# Altium PCB 主板-双BH(1).PcbDoc (part 10 of 13)
Units mm, origin at the board's own origin, x right, y up, seen from the top; angles counter-clockwise.
Board outline 97.69 x 103.45 mm, 2 copper layers (Top Layer, Bottom Layer); 78 components, 75 nets, 243 pads, 279 vias.
Unrouted connection lines stored in the file: 7.
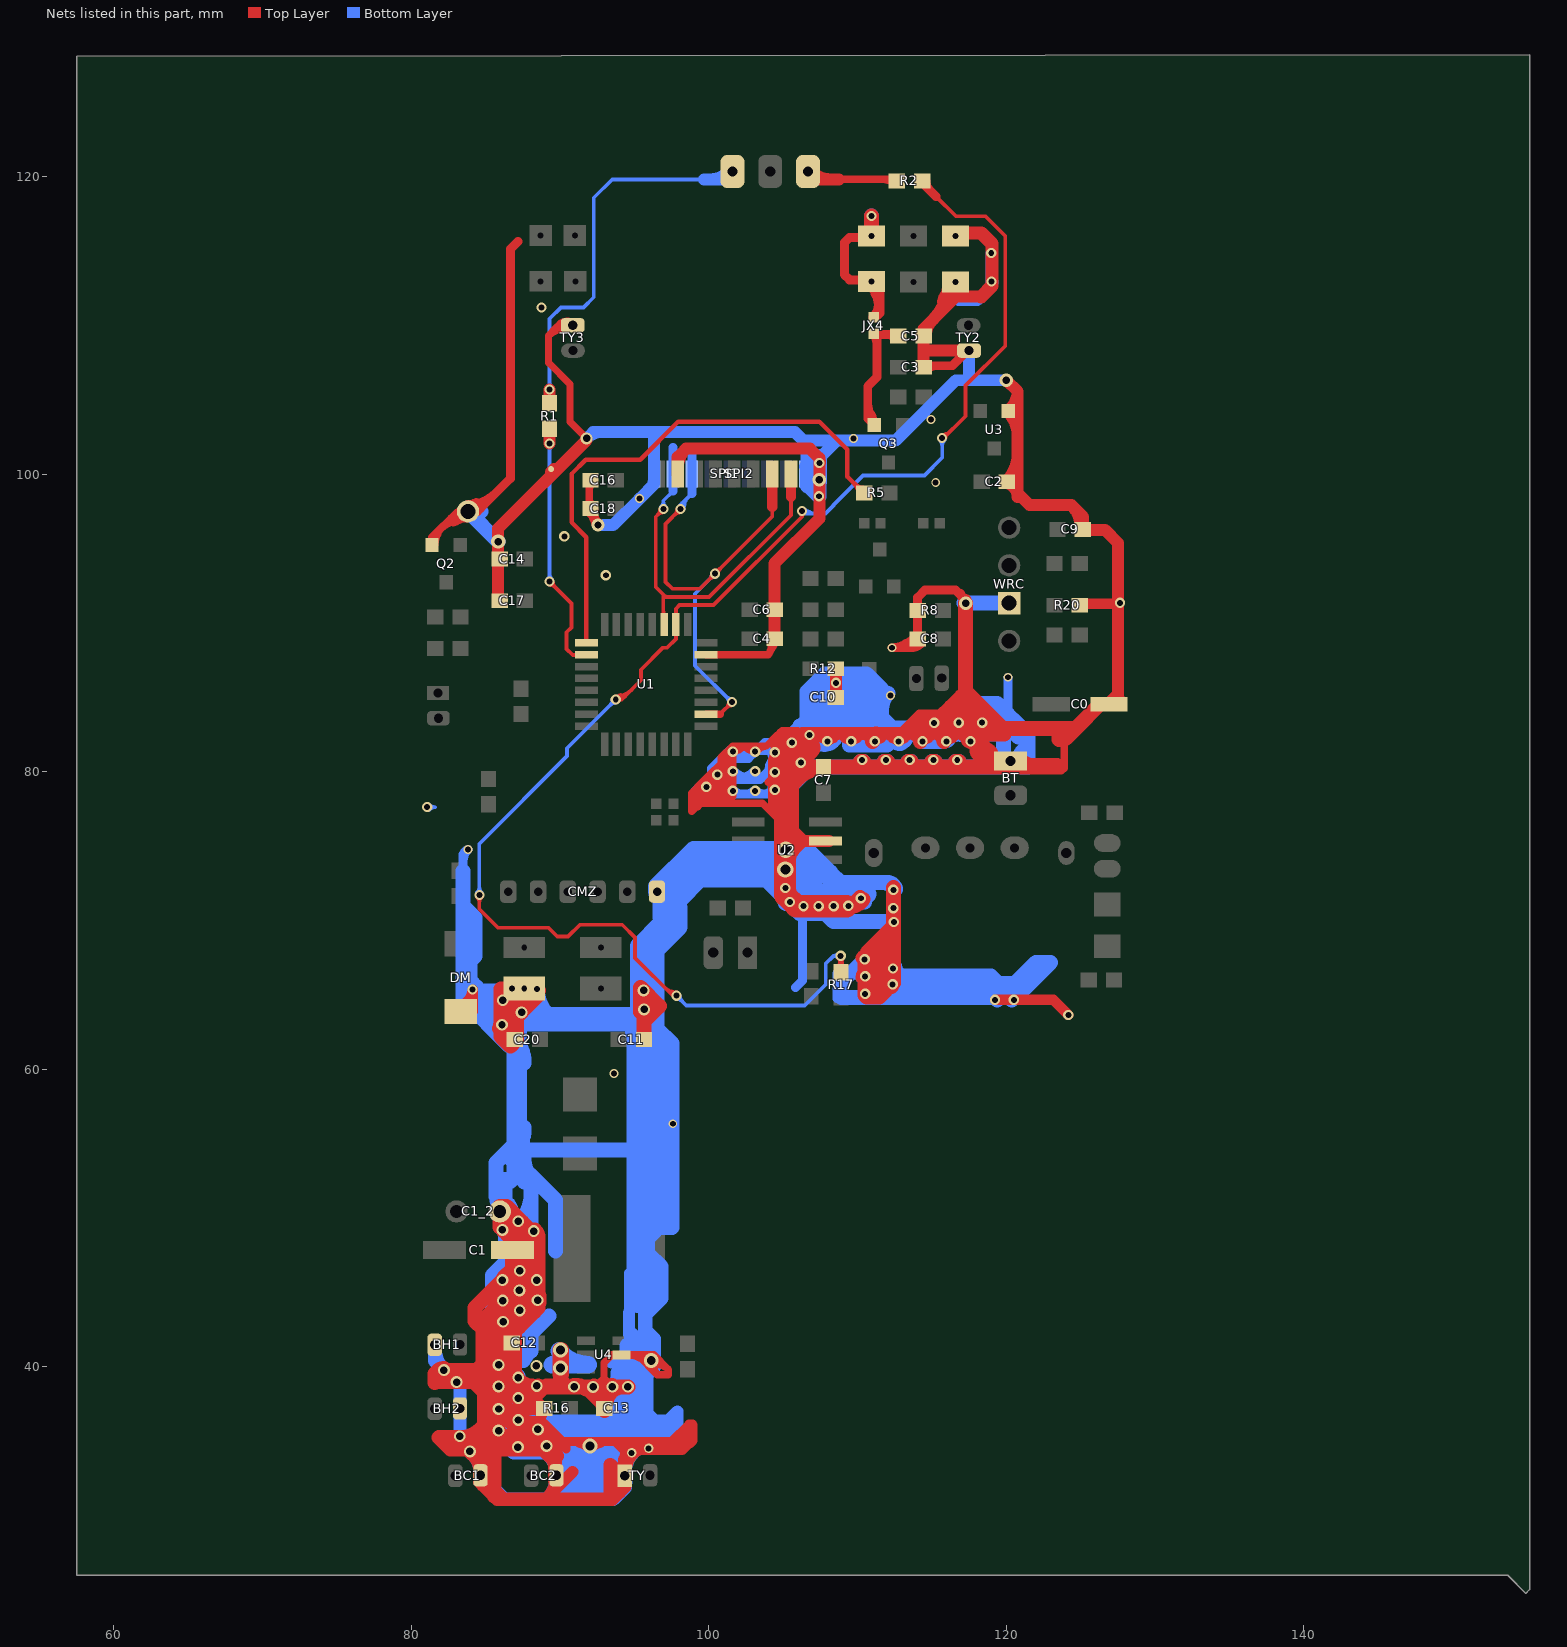
[diagram p10: the nets of this part, all layers, seen from the top]

## Via types
v1: diameter 0.7, hole 0.4, Top Layer to Bottom Layer, 108 vias
v2: diameter 0.68, hole 0.4, Top Layer to Bottom Layer, 87 vias
v3: diameter 0.8, hole 0.5, Top Layer to Bottom Layer, tented both sides, 33 vias
v4: diameter 0.6, hole 0.4, Top Layer to Bottom Layer, 12 vias
v5: diameter 0.9, hole 0.5, Top Layer to Bottom Layer, 8 vias
v6: diameter 0.8, hole 0.5, Top Layer to Bottom Layer, 6 vias
v7: diameter 1, hole 0.75, Top Layer to Bottom Layer, tented both sides, 5 vias
v8: diameter 3.4, hole 2.9, Top Layer to Bottom Layer, 4 vias
v9: diameter 1, hole 0.6, Top Layer to Bottom Layer, tented both sides, 3 vias
v10: diameter 1, hole 0.56, Top Layer to Bottom Layer, tented both sides, 2 vias
v11: diameter 1.1, hole 0.68, Top Layer to Bottom Layer, 2 vias
v12: diameter 0.8, hole 0.4, Top Layer to Bottom Layer, 2 vias
v13: diameter 0.65, hole 0.4, Top Layer to Bottom Layer, tented both sides, 2 vias
v14: diameter 1, hole 0.6, Top Layer to Bottom Layer, tented bottom, 1 vias
v15: diameter 0.7, hole 0.4, Top Layer to Bottom Layer, tented bottom, 1 vias
v16: diameter 0.95, hole 0.5, Top Layer to Bottom Layer, 1 vias
v17: diameter 0.64, hole 0.4, Top Layer to Bottom Layer, 1 vias
v18: diameter 0.62, hole 0.4, Top Layer to Bottom Layer, 1 vias

## Nets (pads, with @x,y where several pads share a name; then routed paths per layer and width w, separated by ;. In a path a pad name is that pad's centre, name@x,y a point inside that pad or via, vN(x,y) a via of type N, cw(c..) or ccw(c..) an arc to the next point about the centre after c; other vN are vias at no path point) (continued)
GND: (continued)
  Bottom Layer w1: 109.985,71.247 ccw(c109.985,71.752) v1@110.342,71.395 ; 109.985,71.247 ccw(c109.985,71.752) v1@110.342,71.395 ; 110.203,66.523 cw(c110.203,65.931) v1@110.621,66.349 ; 110.203,66.523 cw(c110.203,65.931) v1@110.621,66.349 ; 110.203,66.523 cw(c110.203,65.931) v1@110.621,66.349 ; v1@110.206,80.691 ccw(c111.115,81.6) 111.115,80.315 ; v1@110.206,80.691 ccw(c111.115,81.6) 111.115,80.315 ; v1@110.206,80.691 ccw(c111.115,81.6) 111.115,80.315 ; 110.264,64.821 ccw(c110.264,65.326) v1@110.621,64.969 ; 110.264,64.821 ccw(c110.264,65.326) v1@110.621,64.969 ; 110.264,64.821 ccw(c110.264,65.326) v1@110.621,64.969 ; 110.372,82.525 cw(c110.372,81.239) v1@111.281,82.148 ; 110.372,82.525 cw(c110.372,81.239) v1@111.281,82.148 ; 110.372,82.525 cw(c110.372,81.239) v1@111.281,82.148 ; v1@110.398,66.149 cw(c111.107,66.718) v1@110.465,67.361 ; v1@110.398,66.149 cw(c111.107,66.718) v1@110.465,67.361 ; v1@110.398,66.149 cw(c111.107,66.718) v1@110.465,67.361 ; v1@110.409,64.969 ccw(c110.766,65.326) 110.766,64.821 ; v1@110.409,64.969 ccw(c110.766,65.326) 110.766,64.821 ; v1@110.409,64.969 ccw(c110.766,65.326) 110.766,64.821 ; v1@110.409,64.969 v1@110.557,64.821 ; v1@110.409,66.349 cw(c110.828,65.931) 110.828,66.523 ; v1@110.409,66.349 cw(c110.828,65.931) 110.828,66.523 ; v1@110.409,66.349 cw(c110.828,65.931) 110.828,66.523 ; v1@110.44,66.373 cw(c110.832,65.694) 111.035,66.451 ; v1@110.44,66.373 cw(c110.832,65.694) 111.035,66.451 ; v1@110.44,66.373 cw(c110.832,65.694) 111.035,66.451 ; v1@110.44,66.373 cw(c110.832,65.694) 111.035,66.451 ; v1@110.44,66.373 cw(c110.832,65.694) 111.035,66.451 ; v1@110.44,66.373 cw(c110.832,65.694) 111.035,66.451 ; v1@110.465,67.361 109.626,66.523 108.941,65.837 108.941,64.821 v1@110.557,64.821 ; v1@110.465,67.361 111.811,67.361 ; v1@110.557,64.821 113.005,64.821 ; 110.583,82.488 ccw(c111.18,82.488) v1@111.174,81.892 ; 110.583,82.488 ccw(c111.18,82.488) v1@111.174,81.892 ; 110.583,82.488 ccw(c111.18,82.488) v1@111.174,81.892 ; 110.583,82.488 110.583,82.525 ; 110.583,82.488 110.62,82.525 ; 110.583,82.525 cw(c110.583,81.682) v1@111.303,82.12 ; 110.583,82.525 ccw(c111.218,82.525) v1@111.162,81.893 ; 110.583,82.525 ccw(c111.218,82.525) v1@111.162,81.893 ; 110.583,82.525 cw(c110.583,81.682) v1@111.303,82.12 ; 110.583,82.525 cw(c110.583,81.682) v1@111.303,82.12 ; 110.583,82.525 ccw(c111.218,82.525) v1@111.162,81.893 ; 110.583,82.525 ccw(c111.218,82.525) v1@111.162,81.893 ; 110.583,82.525 cw(c110.583,81.682) v1@111.303,82.12 ; 110.583,82.525 cw(c110.583,81.682) v1@111.303,82.12 ; 110.583,82.525 ccw(c111.218,82.525) v1@111.162,81.893 ; 110.583,82.525 ccw(c111.218,82.525) v1@111.162,81.893 ; 110.583,82.525 cw(c110.583,81.682) v1@111.303,82.12 ; 110.583,82.525 110.62,82.525 ; 110.583,82.525 110.583,82.561 ; 110.583,82.561 ccw(c111.259,82.561) v1@111.151,81.894 ; 110.583,82.561 ccw(c111.259,82.561) v1@111.151,81.894 ; 110.583,82.561 ccw(c111.259,82.561) v1@111.151,81.894 ; 110.583,82.561 110.62,82.525 ; 110.62,82.525 cw(c110.62,81.744) v1@111.307,82.113 ; 110.62,82.525 cw(c110.62,81.744) v1@111.307,82.113 ; 110.62,82.525 cw(c110.62,81.744) v1@111.307,82.113 ; 110.62,82.525 cw(c110.62,81.744) v1@111.307,82.113 ; 110.62,82.525 cw(c110.62,81.744) v1@111.307,82.113 ; 110.62,82.525 cw(c110.62,81.744) v1@111.307,82.113 ; 110.62,82.525 112.092,82.525 ; 110.769,66.523 cw(c110.769,64.11) v1@112.476,65.816 ; 110.769,66.523 cw(c110.769,64.11) v1@112.476,65.816 ; 110.769,66.523 cw(c110.769,64.11) v1@112.476,65.816 ; 110.924,81.788 ccw(c110.924,82.293) v1@111.281,81.936 ; 110.924,81.788 ccw(c110.924,82.293) v1@111.281,81.936 ; 110.924,81.788 ccw(c110.924,82.293) v1@111.281,81.936 ; v1@111.069,81.936 ccw(c111.426,82.293) 111.426,81.788 ; v1@111.069,81.936 ccw(c111.426,82.293) 111.426,81.788 ; v1@111.069,81.936 ccw(c111.426,82.293) 111.426,81.788 ; v1@111.069,82.148 cw(c111.978,81.239) 111.978,82.525 ; v1@111.069,82.148 cw(c111.978,81.239) 111.978,82.525 ; v1@111.069,82.148 cw(c111.978,81.239) 111.978,82.525 ; 111.109,80.315 ccw(c111.109,81.6) v1@112.018,80.691 ; 111.109,80.315 ccw(c111.109,81.6) v1@112.018,80.691 ; 111.109,80.315 ccw(c111.109,81.6) v1@112.018,80.691 ; 111.347,67.361 cw(c111.347,65.728) v1@112.501,66.883 ; 111.347,67.361 cw(c111.347,65.728) v1@112.501,66.883 ; 111.347,67.361 cw(c111.347,65.728) v1@112.501,66.883 ; 111.556,72.568 cw(c111.556,71.196) v1@112.526,72.166 ; 111.556,72.568 cw(c111.556,71.196) v1@112.526,72.166 ; 111.556,72.568 cw(c111.556,71.196) v1@112.526,72.166 ; 111.582,66.421 cw(c111.582,65.438) v1@112.511,65.759 ; 111.582,66.421 cw(c111.582,65.438) v1@112.511,65.759 ; 111.582,66.421 cw(c111.582,65.438) v1@112.511,65.759 ; 111.582,66.421 111.912,66.421 ; 111.633,84.213 cw(c113.145,84.213) v4@112.076,85.282 ; 111.633,84.213 cw(c113.145,84.213) v4@112.076,85.282 ; 111.633,84.213 cw(c113.145,84.213) v4@112.076,85.282 ; v1@111.806,80.691 ccw(c112.715,81.6) 112.715,80.315 ; v1@111.806,80.691 ccw(c112.715,81.6) 112.715,80.315 ; v1@111.806,80.691 ccw(c112.715,81.6) 112.715,80.315 ; 111.811,67.361 cw(c111.811,66.601) v1@112.539,66.82 ; 111.811,67.361 cw(c111.811,66.601) v1@112.539,66.82 ; 111.811,67.361 cw(c111.811,66.601) v1@112.539,66.82 ; 111.811,67.361 v1(112.395,66.777) ; 111.899,66.421 ccw(c111.899,67.273) v1@112.501,66.671 ; 111.899,66.421 ccw(c111.899,67.273) v1@112.501,66.671 ; 111.899,66.421 ccw(c111.899,67.273) v1@112.501,66.671 ; 111.912,66.421 ccw(c111.912,67.24) v1@112.503,66.673 ; 111.912,66.421 ccw(c111.912,67.24) v1@112.503,66.673 ; 111.912,66.421 ccw(c111.912,67.24) v1@112.503,66.673 ; 111.912,66.421 v1@112.395,65.938 ; 111.972,82.525 cw(c111.972,81.239) v1@112.881,82.148 ; 111.972,82.525 cw(c111.972,81.239) v1@112.881,82.148 ; 111.972,82.525 cw(c111.972,81.239) v1@112.881,82.148 ; 112.014,72.568 cw(c112.014,72.008) v1@112.569,72.079 ; 112.014,72.568 cw(c112.014,72.008) v1@112.569,72.079 ; 112.014,72.568 cw(c112.014,72.008) v1@112.569,72.079 ; 112.092,82.525 cw(c112.092,81.508) v1@112.893,82.134 ; 112.092,82.525 cw(c112.092,81.508) v1@112.893,82.134 ; 112.092,82.525 cw(c112.092,81.508) v1@112.893,82.134 ; 112.092,82.525 cw(c112.092,81.508) v1@112.893,82.134 ; 112.092,82.525 cw(c112.092,81.508) v1@112.893,82.134 ; 112.092,82.525 cw(c112.092,81.508) v1@112.893,82.134 ; 112.092,82.525 112.092,83.208 ; 112.092,82.525 113.342,82.525 ; 112.092,83.208 ccw(c113.785,83.208) v1@112.677,81.929 ; 112.092,83.208 ccw(c113.785,83.208) v1@112.677,81.929 ; 112.092,83.208 ccw(c113.785,83.208) v1@112.677,81.929 ; 112.092,83.208 112.344,82.956 114.19,82.956 114.605,83.371 116.926,83.371 117.717,84.162 118.162,84.607 119.38,84.607 120.117,83.871 120.701,83.287 ; 112.129,81.924 cw(c112.775,81.277) v1@112.775,82.192 ; 112.129,81.924 cw(c112.775,81.277) v1@112.775,82.192 ; 112.129,81.924 cw(c112.775,81.277) v1@112.775,82.192 ; 112.144,66.523 ccw(c112.144,67.028) v1@112.501,66.671 ; 112.144,66.523 ccw(c112.144,67.028) v1@112.501,66.671 ; 112.144,66.523 ccw(c112.144,67.028) v1@112.501,66.671 ; v1@112.195,66.494 cw(c111.41,65.71) v1@112.52,65.71 ; v1@112.195,66.494 cw(c111.41,65.71) v1@112.52,65.71 ; v1@112.195,66.494 cw(c111.41,65.71) v1@112.52,65.71 ; v1@112.225,65.749 cw(c112.903,65.566) 112.903,66.269 ; v1@112.225,65.749 cw(c112.903,65.566) 112.903,66.269 ; v1@112.225,65.749 cw(c112.903,65.566) 112.903,66.269 ; v1@112.225,65.749 cw(c112.903,65.566) 112.903,66.269 ; v1@112.225,65.749 cw(c112.903,65.566) 112.903,66.269 ; v1@112.225,65.749 cw(c112.903,65.566) 112.903,66.269 ; v1@112.245,66.777 ccw(c113.048,66.777) 112.48,66.209 ; v1@112.245,66.777 ccw(c113.048,66.777) 112.48,66.209 ; v1@112.245,66.777 ccw(c113.048,66.777) 112.48,66.209 ; v1@112.247,66.799 ccw(c112.857,66.705) 112.42,66.269 ; v1@112.247,66.799 ccw(c112.857,66.705) 112.42,66.269 ; v1@112.247,66.799 ccw(c112.857,66.705) 112.42,66.269 ; v1@112.247,66.799 ccw(c112.857,66.705) 112.42,66.269 ; v1@112.247,66.799 ccw(c112.857,66.705) 112.42,66.269 ; v1@112.247,66.799 ccw(c112.857,66.705) 112.42,66.269 ; v1@112.25,66.815 ccw(c112.938,66.631) 112.321,66.275 ; v1@112.25,66.815 ccw(c112.938,66.631) 112.321,66.275 ; v1@112.25,66.815 ccw(c112.938,66.631) 112.321,66.275 ; v1@112.25,66.815 ccw(c112.938,66.631) 112.321,66.275 ; v1@112.25,66.815 ccw(c112.938,66.631) 112.321,66.275 ; v1@112.25,66.815 ccw(c112.938,66.631) 112.321,66.275 ; v1@112.254,66.726 ccw(c112.903,66.958) 112.903,66.269 ; v1@112.254,66.726 ccw(c112.903,66.958) 112.903,66.269 ; v1@112.254,66.726 ccw(c112.903,66.958) 112.903,66.269 ; v1@112.254,66.726 ccw(c112.903,66.958) 112.903,66.269 ; v1@112.254,66.726 ccw(c112.903,66.958) 112.903,66.269 ; v1@112.254,66.726 ccw(c112.903,66.958) 112.903,66.269 ; v1@112.264,65.816 cw(c113.357,64.723) 113.357,66.269 ; v1@112.264,65.816 cw(c113.357,64.723) 113.357,66.269 ; v1@112.264,65.816 cw(c113.357,64.723) 113.357,66.269 ; v1@112.263,66.848 ccw(c112.938,66.482) v1@112.395,65.938 ; v1@112.263,66.848 ccw(c112.938,66.482) v1@112.395,65.938 ; v1@112.263,66.848 ccw(c112.938,66.482) v1@112.395,65.938 ; v1@112.271,65.823 cw(c112.809,65.209) 113.386,65.786 ; v1@112.271,65.823 cw(c112.809,65.209) 113.386,65.786 ; v1@112.271,65.823 cw(c112.809,65.209) 113.386,65.786 ; v1@112.289,66.671 ccw(c113.259,67.641) 113.259,66.269 ; v1@112.289,66.671 ccw(c113.259,67.641) 113.259,66.269 ; v1@112.289,66.671 ccw(c113.259,67.641) 113.259,66.269 ; v1(112.395,66.777) cw(c111.761,66.142) v1@112.492,65.623 ; v1(112.395,66.777) cw(c111.761,66.142) v1@112.492,65.623 ; v1(112.395,66.777) cw(c111.761,66.142) v1@112.492,65.623 ; v1(112.395,66.777) 112.903,66.269 ; 112.42,66.269 cw(c112.053,65.901) v1@112.498,65.632 ; 112.42,66.269 cw(c112.053,65.901) v1@112.498,65.632 ; 112.42,66.269 cw(c112.053,65.901) v1@112.498,65.632 ; 112.42,66.269 cw(c112.053,65.901) v1@112.498,65.632 ; 112.42,66.269 cw(c112.053,65.901) v1@112.498,65.632 ; 112.42,66.269 cw(c112.053,65.901) v1@112.498,65.632 ; 112.42,66.269 112.903,66.269 ; 112.42,66.269 112.903,65.786 113.386,65.786 ; 112.493,82.309 cw(c112.493,81.76) v1@112.881,82.148 ; 112.493,82.309 cw(c112.493,81.76) v1@112.881,82.148 ; 112.493,82.309 cw(c112.493,81.76) v1@112.881,82.148 ; v1@112.644,82.115 cw(c113.342,81.725) 113.342,82.525 ; v1@112.644,82.115 cw(c113.342,81.725) 113.342,82.525 ; v1@112.644,82.115 cw(c113.342,81.725) 113.342,82.525 ; v1@112.644,82.115 cw(c113.342,81.725) 113.342,82.525 ; v1@112.644,82.115 cw(c113.342,81.725) 113.342,82.525 ; v1@112.644,82.115 cw(c113.342,81.725) 113.342,82.525 ; v1@112.669,82.148 cw(c113.578,81.239) 113.578,82.525 ; v1@112.669,82.148 cw(c113.578,81.239) 113.578,82.525 ; v1@112.669,82.148 cw(c113.578,81.239) 113.578,82.525 ; 112.709,80.315 ccw(c112.709,81.6) v1@113.618,80.691 ; 112.709,80.315 ccw(c112.709,81.6) v1@113.618,80.691 ; 112.709,80.315 ccw(c112.709,81.6) v1@113.618,80.691 ; v1@112.797,81.894 ccw(c112.705,82.525) 113.342,82.525 ; v1@112.797,81.894 ccw(c112.705,82.525) 113.342,82.525 ; v1@112.797,81.894 ccw(c112.705,82.525) 113.342,82.525 ; 112.903,66.269 118.974,66.269 119.456,65.786 ; 112.903,66.269 113.386,65.786 ; 113.005,64.821 114.351,64.821 ; 113.342,82.525 116.027,82.525 ; 113.386,65.786 118.694,65.786 ; 113.386,65.786 114.351,64.821 ; v1@113.406,80.691 ccw(c114.315,81.6) 114.315,80.315 ; v1@113.406,80.691 ccw(c114.315,81.6) 114.315,80.315 ; v1@113.406,80.691 ccw(c114.315,81.6) 114.315,80.315 ; 113.572,82.525 cw(c113.572,81.239) v1@114.481,82.148 ; 113.572,82.525 cw(c113.572,81.239) v1@114.481,82.148 ; 113.572,82.525 cw(c113.572,81.239) v1@114.481,82.148 ; 113.686,82.525 ccw(c113.686,84.764) v1@115.27,83.181 ; 113.686,82.525 ccw(c113.686,84.764) v1@115.27,83.181 ; 113.686,82.525 ccw(c113.686,84.764) v1@115.27,83.181 ; v1@114.269,82.148 cw(c115.178,81.239) 115.178,82.525 ; v1@114.269,82.148 cw(c115.178,81.239) 115.178,82.525 ; v1@114.269,82.148 cw(c115.178,81.239) 115.178,82.525 ; 114.309,80.315 ccw(c114.309,81.6) v1@115.218,80.691 ; 114.309,80.315 ccw(c114.309,81.6) v1@115.218,80.691 ; 114.309,80.315 ccw(c114.309,81.6) v1@115.218,80.691 ; 114.351,64.821 v1@119.456,64.821 ; v1@115.006,80.691 ccw(c115.915,81.6) 115.915,80.315 ; v1@115.006,80.691 ccw(c115.915,81.6) 115.915,80.315 ; v1@115.006,80.691 ccw(c115.915,81.6) 115.915,80.315 ; v1@115.022,83.237 ccw(c116.027,83.59) 116.027,82.525 ; v1@115.022,83.237 ccw(c116.027,83.59) 116.027,82.525 ; v1@115.022,83.237 ccw(c116.027,83.59) 116.027,82.525 ; 115.172,82.525 cw(c115.172,81.239) v1@116.081,82.148 ; 115.172,82.525 cw(c115.172,81.239) v1@116.081,82.148 ; 115.172,82.525 cw(c115.172,81.239) v1@116.081,82.148 ; v1@115.825,82.042 cw(c116.503,82.042) 116.024,82.521 ; v1@115.825,82.042 cw(c116.503,82.042) 116.024,82.521 ; v1@115.825,82.042 cw(c116.503,82.042) 116.024,82.521 ; v1@115.825,82.042 cw(c116.503,82.042) 116.024,82.521 ; v1@115.825,82.042 cw(c116.503,82.042) 116.024,82.521 ; v1@115.825,82.042 cw(c116.503,82.042) 116.024,82.521 ; v1@115.825,82.042 cw(c116.503,82.042) 116.024,82.521 ; v1@115.825,82.042 cw(c116.503,82.042) 116.024,82.521 ; v1@115.825,82.042 cw(c116.503,82.042) 116.024,82.521 ; v1@115.869,82.148 cw(c116.778,81.239) 116.778,82.525 ; v1@115.869,82.148 cw(c116.778,81.239) 116.778,82.525 ; v1@115.869,82.148 cw(c116.778,81.239) 116.778,82.525 ; 115.909,80.315 ccw(c115.909,81.6) v1@116.818,80.691 ; 115.909,80.315 ccw(c115.909,81.6) v1@116.818,80.691 ; 115.909,80.315 ccw(c115.909,81.6) v1@116.818,80.691 ; 116.027,82.525 ccw(c116.027,83.48) v1@116.961,83.281 ; 116.027,82.525 ccw(c116.027,83.48) v1@116.961,83.281 ; 116.027,82.525 ccw(c116.027,83.48) v1@116.961,83.281 ; 116.027,82.525 116.789,83.287 117.907,83.287 119.99,83.287 ; 116.027,82.525 119.507,82.525 ; v1@116.606,80.691 ccw(c117.515,81.6) 117.515,80.315 ; v1@116.606,80.691 ccw(c117.515,81.6) 117.515,80.315 ; v1@116.606,80.691 ccw(c117.515,81.6) 117.515,80.315 ; v1@116.709,83.206 ccw(c118.353,84.851) 118.353,82.525 ; v1@116.709,83.206 ccw(c118.353,84.851) 118.353,82.525 ; v1@116.709,83.206 ccw(c118.353,84.851) 118.353,82.525 ; 116.799,82.525 cw(c116.799,81.239) v1@117.708,82.148 ; 116.799,82.525 cw(c116.799,81.239) v1@117.708,82.148 ; 116.799,82.525 cw(c116.799,81.239) v1@117.708,82.148 ; 116.851,82.525 ccw(c116.851,84.851) v1@118.495,83.206 ; 116.851,82.525 ccw(c116.851,84.851) v1@118.495,83.206 ; 116.851,82.525 ccw(c116.851,84.851) v1@118.495,83.206 ; v1@117.496,82.148 cw(c118.405,81.239) 118.405,82.525 ; v1@117.496,82.148 cw(c118.405,81.239) 118.405,82.525 ; v1@117.496,82.148 cw(c118.405,81.239) 118.405,82.525 ; v1@118.26,83.236 ccw(c119.507,83.973) 119.507,82.525 ; v1@118.26,83.236 ccw(c119.507,83.973) 119.507,82.525 ; v1@118.26,83.236 ccw(c119.507,83.973) 119.507,82.525 ; 118.497,80.315 ccw(c118.497,82.074) BT.2@119.741,80.83 ; 118.497,80.315 ccw(c118.497,82.074) BT.2@119.741,80.83 ; 118.497,80.315 ccw(c118.497,82.074) BT.2@119.741,80.83 ; 118.694,65.786 119.456,65.024 ; 118.694,65.786 119.456,65.786 ; 118.828,80.315 ccw(c118.828,81.373) BT.2@119.72,80.805 ; 118.828,80.315 cw(c119.548,79.595) BT.2@119.809,80.579 ; 118.828,80.315 ccw(c118.828,81.373) BT.2@119.72,80.805 ; 118.828,80.315 ccw(c118.828,81.373) BT.2@119.72,80.805 ; 118.828,80.315 cw(c119.548,79.595) BT.2@119.809,80.579 ; 118.828,80.315 ccw(c118.828,81.373) BT.2@119.72,80.805 ; 118.828,80.315 ccw(c118.828,81.373) BT.2@119.72,80.805 ; 118.828,80.315 cw(c119.548,79.595) BT.2@119.809,80.579 ; 118.828,80.315 ccw(c118.828,81.373) BT.2@119.72,80.805 ; 118.828,80.315 BT.2@120.297,80.315 ; 118.828,80.315 119.812,81.299 119.812,82.829 119.507,82.525 ; 119.114,65.366 cw(c118.416,64.668) v1@119.403,64.668 ; 119.114,65.366 cw(c118.416,64.668) v1@119.403,64.668 ; 119.114,65.366 cw(c118.416,64.668) v1@119.403,64.668 ; 119.158,80.494 cw(c119.586,79.751) BT.2@119.808,80.579 ; 119.158,80.494 cw(c119.586,79.751) BT.2@119.808,80.579 ; 119.158,80.494 cw(c119.586,79.751) BT.2@119.808,80.579 ; v1@119.456,64.821 119.456,65.024 ; v1@119.456,64.821 119.659,64.821 ; 119.456,65.024 119.456,65.786 ; 119.456,65.024 119.659,64.821 ; 119.456,65.786 120.599,65.786 121.996,67.183 122.987,67.183 120.625,64.821 119.939,64.821 ; 119.659,64.821 119.939,64.821 ; BT.2@119.93,80.491 ccw(c120.163,80.557) BT.2@120.163,80.315 ; BT.2@119.93,80.491 ccw(c120.163,80.557) BT.2@120.163,80.315 ; BT.2@119.93,80.491 ccw(c120.163,80.557) BT.2@120.163,80.315 ; 119.99,83.287 120.701,83.287 ; BT.2@120.297,80.315 121.488,80.315 ; v1@120.373,64.668 cw(c121.789,64.668) 120.788,65.67 ; v1@120.373,64.668 cw(c121.789,64.668) 120.788,65.67 ; v1@120.373,64.668 cw(c121.789,64.668) 120.788,65.67 ; BT.2@120.657,80.844 ccw(c119.425,82.499) 121.488,82.499 ; BT.2@120.657,80.844 ccw(c119.425,82.499) 121.488,82.499 ; BT.2@120.657,80.844 ccw(c119.425,82.499) 121.488,82.499 ; 120.701,83.287 121.488,82.499 ; BT.2@120.891,80.765 ccw(c121.488,80.936) 121.488,80.315 ; BT.2@120.891,80.765 ccw(c121.488,80.936) 121.488,80.315 ; BT.2@120.891,80.765 ccw(c121.488,80.936) 121.488,80.315 ; BT.2@120.896,80.741 cw(c121.747,80.841) BT.2@121.075,81.372 ; BT.2@120.896,80.741 cw(c121.747,80.841) BT.2@121.075,81.372 ; BT.2@120.896,80.741 cw(c121.747,80.841) BT.2@121.075,81.372 ; 121.488,80.315 121.488,82.499 ; 85.457,65.033 cw(c85.457,63.943) 86.228,64.714 ccw(c85.457,63.943) 85.457,65.033 ; 86.157,63.554 cw(c87.971,63.554) 87.138,65.165 ccw(c87.971,63.554) 86.157,63.554 ; 86.157,64.192 cw(c87.101,64.192) 87.024,65.133 ccw(c87.101,64.192) 86.157,64.192 ; v3@86.174,63.066 cw(c85.251,62.063) 86.614,62.063 ccw(c85.251,62.063) v3@86.174,63.066
  Bottom Layer w1.2: 84.072,65.724 v2@84.364,65.432 ; pad.0@88.028,64.948 pad.0@88.205,64.77 ; 88.205,63.686 pad.0@88.205,64.77 ; 89.484,40.132 91.897,40.132 ; 89.831,63.144 89.84,63.144 94.894,63.144 ; 94.615,37.186 94.615,41.395 ; 94.971,62.407 95.326,62.763 ; 95.152,63.402 94.894,63.144 ; v3@95.326,63.979 95.326,68.301 96.825,69.799 ; 95.327,62.763 95.708,63.144 ; v3(95.656,64.033) 95.656,66.345 ; 95.656,66.712 95.656,67.632 ; 96.241,63.677 95.708,63.144 ; 96.52,68.123 97.968,69.571 97.968,70.866 ; 97.307,71.166 97.866,70.608 97.866,71.944 97.866,72.583 98.867,73.584 98.867,73.203 ; 99.455,72.836 102.173,72.836 ; 99.466,73.152 99.466,73.99 100.576,73.99 96.825,70.239 96.825,71.649 CMZ.2@96.53,71.944 96.53,72.298 98.994,74.762 105.171,74.762 v11(105.181,74.752) ; 99.606,72.885 101.483,74.762 ; 101.295,73.711 104.49,73.711 ; 101.987,73.863 102.593,73.256 ; v11@105.054,73.431 102.768,73.431 102.593,73.256 ; v11@105.181,73.863 106.426,73.863 ; 105.461,72.822 106.451,72.822 ; 105.994,72.365 106.136,72.222 ; 106.136,72.507 106.136,72.222 ; 106.959,73.33 106.426,73.863 ; 107.163,72.822 106.451,72.822 ; 107.213,72.085 105.705,72.085 105.156,71.536 ; v1@108.179,71.12 v1@108.179,71.145 ; 108.636,72.06 110.414,72.06 110.693,71.78 110.414,71.501 v1(110.236,71.501) 109.195,71.501 108.788,71.501 ; v3@87.517,63.652 ccw(c86.952,64.77) pad.0@88.205,64.77 ; v3@87.517,63.652 ccw(c86.952,64.77) pad.0@88.205,64.77 ; v3@87.517,63.652 ccw(c86.952,64.77) pad.0@88.205,64.77 ; v9@89.965,41.06 ccw(c91.897,42.607) 91.897,40.132 ; v9@89.965,41.06 ccw(c91.897,42.607) 91.897,40.132 ; v9@89.965,41.06 ccw(c91.897,42.607) 91.897,40.132 ; 94.894,63.144 ccw(c94.894,64.11) v3@95.855,64.013 ; 94.894,63.144 ccw(c94.894,64.11) v3@95.855,64.013 ; 94.894,63.144 ccw(c94.894,64.11) v3@95.855,64.013 ; 94.894,63.144 95.708,63.144 ; 95.326,64.348 ccw(c95.971,64.348) v3@95.515,63.892 ; 95.326,64.348 ccw(c95.971,64.348) v3@95.515,63.892 ; 95.326,64.348 ccw(c95.971,64.348) v3@95.515,63.892 ; 95.333,62.769 ccw(c94.068,64.033) v3@95.856,64.033 ; 95.333,62.769 ccw(c94.068,64.033) v3@95.856,64.033 ; 95.333,62.769 ccw(c94.068,64.033) v3@95.856,64.033 ; 95.708,63.144 ccw(c95.136,63.717) v3@95.827,64.137 ; 95.708,63.144 ccw(c95.136,63.717) v3@95.827,64.137 ; 95.708,63.144 ccw(c95.136,63.717) v3@95.827,64.137 ; 95.708,63.144 ccw(c95.136,63.717) v3@95.827,64.137 ; 95.708,63.144 ccw(c95.136,63.717) v3@95.827,64.137 ; 95.708,63.144 ccw(c95.136,63.717) v3@95.827,64.137 ; CMZ.2@96.565,71.779 cw(c95.939,71.153) 96.825,71.153 ; CMZ.2@96.565,71.779 cw(c95.939,71.153) 96.825,71.153 ; CMZ.2@96.565,71.779 cw(c95.939,71.153) 96.825,71.153 ; 102.173,72.836 102.593,73.256 ; 102.173,72.836 103.014,72.836 ; 102.593,73.256 103.014,72.836 ; 103.014,72.836 103.745,72.836 104.583,72.836 ; 103.84,72.836 ccw(c103.84,74.748) v11@105.191,73.396 ; 103.84,72.836 ccw(c103.84,74.748) v11@105.191,73.396 ; 103.84,72.836 ccw(c103.84,74.748) v11@105.191,73.396 ; 104.192,72.836 cw(c104.192,71.223) v1@105.333,72.364 ; 104.192,72.836 cw(c104.192,71.223) v1@105.333,72.364 ; 104.192,72.836 cw(c104.192,71.223) v1@105.333,72.364 ; 104.583,72.836 ccw(c104.583,73.46) v11@105.206,73.429 ; 104.583,72.836 cw(c104.583,71.975) v1@105.391,72.273 ; 104.583,72.836 ccw(c104.583,73.46) v11@105.206,73.429 ; 104.583,72.836 cw(c104.583,71.975) v1@105.391,72.273 ; 104.583,72.836 ccw(c104.583,73.46) v11@105.206,73.429 ; 104.583,72.836 cw(c104.583,71.975) v1@105.391,72.273 ; 104.602,73.711 cw(c104.602,72.878) v11@105.191,73.467 ; 104.602,73.711 cw(c104.602,72.878) v11@105.191,73.467 ; 104.602,73.711 cw(c104.602,72.878) v11@105.191,73.467 ; 104.602,73.711 cw(c104.602,72.878) v11@105.191,73.467 ; 104.602,73.711 cw(c104.602,72.878) v11@105.191,73.467 ; 104.602,73.711 cw(c104.602,72.878) v11@105.191,73.467 ; v1@104.979,72.01 ccw(c106.124,73.154) 106.124,71.536 ; v1@104.979,72.01 ccw(c106.124,73.154) 106.124,71.536 ; v1@104.979,72.01 ccw(c106.124,73.154) 106.124,71.536 ; v1@104.979,72.364 cw(c106.085,71.257) 106.085,72.822 ; v1@104.979,72.364 cw(c106.085,71.257) 106.085,72.822 ; v1@104.979,72.364 cw(c106.085,71.257) 106.085,72.822 ; v1@105.05,72.413 cw(c105.457,71.543) 106.136,72.222 ; v1@105.05,72.413 cw(c105.457,71.543) 106.136,72.222 ; v1@105.05,72.413 cw(c105.457,71.543) 106.136,72.222 ; v11@105.12,73.397 ccw(c106.451,74.651) 106.451,72.822 ; v11@105.12,73.397 ccw(c106.451,74.651) 106.451,72.822 ; v11@105.12,73.397 ccw(c106.451,74.651) 106.451,72.822 ; v11@105.121,73.467 cw(c106.078,72.51) 106.078,73.863 ; v11@105.121,73.467 cw(c106.078,72.51) 106.078,73.863 ; v11@105.121,73.467 cw(c106.078,72.51) 106.078,73.863 ; v11@105.135,74.733 ccw(c106.426,75.256) 106.426,73.863 ; v11@105.135,74.733 ccw(c106.426,75.256) 106.426,73.863 ; v11@105.135,74.733 ccw(c106.426,75.256) 106.426,73.863 ; 105.156,71.536 ccw(c104.549,72.143) v1@105.405,72.205 ; 105.156,71.536 ccw(c104.549,72.143) v1@105.405,72.205 ; 105.156,71.536 ccw(c104.549,72.143) v1@105.405,72.205 ; 105.156,71.536 108.88,71.536 ; v1@105.211,71.247 cw(c106.041,71.247) 105.454,71.834 ; v1@105.211,71.247 cw(c106.041,71.247) 105.454,71.834 ; v1@105.211,71.247 cw(c106.041,71.247) 105.454,71.834 ; v1@105.284,71.424 cw(c106.881,69.827) 106.881,72.085 ; v1@105.284,71.424 cw(c106.881,69.827) 106.881,72.085 ; v1@105.284,71.424 cw(c106.881,69.827) 106.881,72.085 ; 105.29,71.836 cw(c104.867,71.079) v1@105.701,71.315 ; 105.29,71.836 cw(c104.867,71.079) v1@105.701,71.315 ; 105.29,71.836 cw(c104.867,71.079) v1@105.701,71.315 ; v1@105.306,71.443 cw(c105.703,70.94) 105.779,71.577 ; v1@105.306,71.443 cw(c105.703,70.94) 105.779,71.577 ; v1@105.306,71.443 cw(c105.703,70.94) 105.779,71.577 ; v1@105.607,71.536 cw(c105.607,70.199) v1@106.552,71.144 ; v1@105.607,71.536 cw(c105.607,70.199) v1@106.552,71.144 ; v1@105.607,71.536 cw(c105.607,70.199) v1@106.552,71.144 ; v1@106.198,71.144 cw(c107.144,70.199) 107.144,71.536 ; v1@106.198,71.144 cw(c107.144,70.199) 107.144,71.536 ; v1@106.198,71.144 cw(c107.144,70.199) 107.144,71.536 ; 106.623,71.536 cw(c106.623,70.199) v1@107.568,71.144 ; 106.623,71.536 cw(c106.623,70.199) v1@107.568,71.144 ; 106.623,71.536 cw(c106.623,70.199) v1@107.568,71.144 ; v1@107.214,71.144 cw(c108.16,70.199) 108.16,71.536 ; v1@107.214,71.144 cw(c108.16,70.199) 108.16,71.536 ; v1@107.214,71.144 cw(c108.16,70.199) 108.16,71.536 ; 107.639,71.536 cw(c107.639,70.199) v1@108.584,71.144 ; 107.639,71.536 cw(c107.639,70.199) v1@108.584,71.144 ; 107.639,71.536 cw(c107.639,70.199) v1@108.584,71.144 ; v1@108.168,71.039 cw(c108.788,70.853) 108.788,71.501 ; v1@108.168,71.039 cw(c108.788,70.853) 108.788,71.501 ; v1@108.168,71.039 cw(c108.788,70.853) 108.788,71.501 ; v1@108.176,71.062 cw(c108.88,70.775) 108.88,71.536 ; v1@108.176,71.062 cw(c108.88,70.775) 108.88,71.536 ; v1@108.176,71.062 cw(c108.88,70.775) 108.88,71.536 ; v1@108.23,71.144 cw(c109.091,70.283) 109.091,71.501 ; v1@108.23,71.144 cw(c109.091,70.283) 109.091,71.501 ; v1@108.23,71.144 cw(c109.091,70.283) 109.091,71.501 ; 108.69,71.536 cw(c108.69,70.286) v1@109.575,71.17 ; 108.69,71.536 cw(c108.69,70.286) v1@109.575,71.17 ; 108.69,71.536 cw(c108.69,70.286) v1@109.575,71.17 ; 108.788,71.501 cw(c108.788,70.402) v1@109.577,71.167 ; 108.788,71.501 cw(c108.788,70.402) v1@109.577,71.167 ; 108.788,71.501 cw(c108.788,70.402) v1@109.577,71.167 ; 108.88,71.536 cw(c108.88,70.682) v1@109.612,71.122 ; 108.88,71.536 cw(c108.88,70.682) v1@109.612,71.122 ; 108.88,71.536 cw(c108.88,70.682) v1@109.612,71.122 ; v1@109.221,71.17 cw(c110.021,70.37) v1@110.021,71.501 ; v1@109.221,71.17 cw(c110.021,70.37) v1@110.021,71.501 ; v1@109.221,71.17 cw(c110.021,70.37) v1@110.021,71.501 ; 109.49,72.06 cw(c109.49,70.755) v1@110.413,71.678 ; 109.49,72.06 cw(c109.49,70.755) v1@110.413,71.678 ; 109.49,72.06 cw(c109.49,70.755) v1@110.413,71.678
  Bottom Layer w1.5: v11@105.181,72.923 105.181,73.863 v11@105.181,74.574 ; v11@105.156,74.6 cw(c104.408,73.852) v11@105.33,73.333 ; v11@105.156,74.6 cw(c104.408,73.852) v11@105.33,73.333 ; v11@105.156,74.6 cw(c104.408,73.852) v11@105.33,73.333 ; v11@105.156,74.6 v11@105.181,74.574 ; v11@105.181,74.574 cw(c104.466,73.859) v11@105.326,73.326 ; v11@105.181,74.574 cw(c104.466,73.859) v11@105.326,73.326 ; v11@105.181,74.574 cw(c104.466,73.859) v11@105.326,73.326
  other v1: 110.515,65.075 88.443,65.405 112.37,65.71 110.515,66.243 112.446,69.901 109.398,70.993 105.461,71.247 103.124,78.715 104.445,78.791 104.445,79.985 103.124,80.038 106.197,80.62 110.312,80.797 111.912,80.797 113.512,80.797 115.112,80.797 116.712,80.797 104.445,81.305 101.629,81.356 107.975,82.042 109.575,82.042 111.175,82.042 112.775,82.042 115.975,82.042 106.782,82.474 115.164,83.287 118.389,83.312 108.56,85.979 93.091,93.218 90.297,95.834
  other v2: 81.077,77.622 127.66,91.364 88.748,111.227 119.024,112.954
  other v3: 83.947,34.315 87.173,34.595 83.261,35.331 85.877,35.712 88.519,35.789 85.877,37.16 87.198,37.896 83.058,38.964 82.194,39.776 88.417,40.056 85.877,40.132 86.182,43.028 87.3,43.79 88.494,44.475 87.274,45.136 88.443,45.822 87.3,46.457 88.24,49.124 86.131,49.2 87.198,49.784 86.106,62.992 95.631,65.303
  other v4: 97.587,56.337 93.624,59.715 112.217,85.141 115.265,99.466 109.728,102.413 114.96,103.683
  other v6: 93.523,38.659 94.564,38.659
  other v9: 90.043,39.929
HWKZ: R5.2 U1.17 | length 39.5
  Top Layer w0.3: U1.17@91.775,88.677 91.775,95.778 90.78,96.774 90.78,100.025 91.745,100.99 95.402,100.99 97.961,103.549 107.429,103.549 109.327,101.65 ; 109.327,101.675 109.327,99.848 R5.2@110.15,99.025 ; 109.793,99.382 cw(c109.166,98.755) R5.2@110.053,98.755 ; 109.793,99.382 cw(c109.166,98.755) R5.2@110.053,98.755 ; 109.793,99.382 cw(c109.166,98.755) R5.2@110.053,98.755 ; 109.835,99.34 ccw(c110.403,99.908) R5.2@110.403,99.105 ; 109.835,99.34 ccw(c110.403,99.908) R5.2@110.403,99.105 ; 109.835,99.34 ccw(c110.403,99.908) R5.2@110.403,99.105
HWPOW: C5.2 JX4.1 JX4.2 pad.0@110.95,112.956 pad.0@110.95,116.032 Q3.2 | length 39.8
  Top Layer w0.6: pad.0@110.95,112.956 110.837,113.069 109.478,113.069 109.124,113.423 109.124,115.583 109.478,115.937 110.855,115.937 pad.0@110.95,116.032 ; 110.995,103.815 ccw(c111.387,103.815) Q3.2@111.209,103.466 ; Q3.2@111.14,103.307 110.693,103.754 110.693,105.918 111.303,106.528 111.303,109.398 112.51,109.398 C5.2@112.79,109.118 ; 110.693,104.773 ccw(c112.581,104.773) Q3.2@111.246,103.438 ; 110.693,104.773 ccw(c112.581,104.773) Q3.2@111.246,103.438 ; 110.693,104.773 ccw(c112.581,104.773) Q3.2@111.246,103.438 ; 110.91,104.021 cw(c110.168,103.593) Q3.2@110.995,103.371 ; 110.91,104.021 cw(c110.168,103.593) Q3.2@110.995,103.371 ; 110.91,104.021 cw(c110.168,103.593) Q3.2@110.995,103.371 ; JX4.1@111.065,109.414 cw(c110.49,108.839) 111.303,108.839 ; JX4.1@111.065,109.414 cw(c110.49,108.839) 111.303,108.839 ; JX4.1@111.065,109.414 cw(c110.49,108.839) 111.303,108.839 ; 111.981,109.398 cw(c111.981,108.581) C5.2@112.559,109.159 ; 111.981,109.398 cw(c111.981,108.581) C5.2@112.559,109.159 ; 111.981,109.398 cw(c111.981,108.581) C5.2@112.559,109.159
  Top Layer w0.7: pad.0@110.95,112.956 111.455,112.451 111.455,110.855 JX4.2@111.323,110.723 ; pad.0@110.903,112.708 cw(c109.568,111.374) 111.455,111.374 ; pad.0@110.903,112.708 cw(c109.568,111.374) 111.455,111.374 ; pad.0@110.903,112.708 cw(c109.568,111.374) 111.455,111.374 ; JX4.2@111.1,110.55 ccw(c110.242,111.407) 111.455,111.407 ; JX4.2@111.1,110.55 ccw(c110.242,111.407) 111.455,111.407 ; JX4.2@111.1,110.55 ccw(c110.242,111.407) 111.455,111.407 ; 111.293,112.031 cw(c111.767,112.305) pad.0@111.391,112.702 ; 111.293,112.031 cw(c111.767,112.305) pad.0@111.391,112.702 ; 111.293,112.031 cw(c111.767,112.305) pad.0@111.391,112.702
  Top Layer w1: pad.0@110.95,116.006 v2(110.95,117.373)
  Bottom Layer w1: pad.0@110.95,116.006 v2(110.95,117.373)
IRQ: SPI1.1 SPI2.1 U1.11 | length 32.2
  Top Layer w0.254: U1.11@96.952,89.902 96.952,91.923 ; v2(96.952,97.663) 96.444,97.155 96.444,92.431 96.952,91.923 ; 105.537,98.501 105.537,97.257 100.025,91.745 97.13,91.745 96.952,91.923 ; 96.588,97.299 ccw(c96.225,97.663) v2@96.739,97.663 ; 96.588,97.299 cw(c96.952,96.936) v2@96.952,97.45 ; 96.588,97.299 ccw(c96.225,97.663) v2@96.739,97.663 ; 96.588,97.299 cw(c96.952,96.936) v2@96.952,97.45 ; 96.588,97.299 ccw(c96.225,97.663) v2@96.739,97.663 ; 96.588,97.299 cw(c96.952,96.936) v2@96.952,97.45 ; 96.952,90.841 ccw(c97.413,90.841) U1.11@97.087,90.514 ; 96.952,90.841 ccw(c97.413,90.841) U1.11@97.087,90.514 ; 96.952,90.841 ccw(c97.413,90.841) U1.11@97.087,90.514
  Top Layer w0.7: 105.537,98.501 SPI1.1@105.537,100.032
  Bottom Layer w0.254: v2(96.952,97.663) 96.952,98.222 97.6,98.87 ; v2@96.801,97.814 ccw(c96.438,98.177) 96.952,98.177 ; v2@96.801,97.814 ccw(c96.438,98.177) 96.952,98.177 ; v2@96.801,97.814 ccw(c96.438,98.177) 96.952,98.177 ; 96.952,98.177 ccw(c97.466,98.177) v2@97.102,97.814 ; 96.952,98.177 ccw(c97.466,98.177) v2@97.102,97.814 ; 96.952,98.177 ccw(c97.466,98.177) v2@97.102,97.814
  Bottom Layer w0.6: 97.6,98.87 97.6,101.803
L-G: pad.0@101.6,120.36 R1.1 | length 49.2
  Top Layer w0.254: R1.1@89.387,104.656 R1.1@89.5,104.769
  Top Layer w0.8: R1.1@89.3,104.769 v2(89.3,105.704)
  Bottom Layer w0.254: v2(89.3,105.704) 89.3,110.458 90.068,111.227 91.592,111.227 92.278,111.912 92.278,118.593 93.517,119.832 pad.0@101.468,119.832 ; v2@89.3,105.904 v2@89.5,105.704 ; v2@89.149,105.854 ccw(c88.786,106.218) 89.3,106.218 ; v2@89.149,105.854 ccw(c88.786,106.218) 89.3,106.218 ; v2@89.149,105.854 ccw(c88.786,106.218) 89.3,106.218 ; 89.3,106.218 ccw(c89.814,106.218) v2@89.451,105.854 ; 89.3,106.218 ccw(c89.814,106.218) v2@89.451,105.854 ; 89.3,106.218 ccw(c89.814,106.218) v2@89.451,105.854 ; 99.424,119.832 ccw(c99.424,122.236) pad.0@101.124,120.536 ; 99.424,119.832 ccw(c99.424,122.236) pad.0@101.124,120.536 ; 99.424,119.832 ccw(c99.424,122.236) pad.0@101.124,120.536 ; 100.038,119.832 ccw(c100.038,121.622) pad.0@101.304,120.356 ; 100.038,119.832 ccw(c100.038,121.622) pad.0@101.304,120.356 ; 100.038,119.832 ccw(c100.038,121.622) pad.0@101.304,120.356 ; 100.526,119.832 cw(c100.526,118.986) pad.0@101.124,119.584 ; 100.526,119.832 cw(c100.526,118.986) pad.0@101.124,119.584 ; 100.526,119.832 cw(c100.526,118.986) pad.0@101.124,119.584 ; 100.651,119.832 ccw(c100.651,121.009) pad.0@101.483,120.177 ; 100.651,119.832 ccw(c100.651,121.009) pad.0@101.483,120.177 ; 100.651,119.832 ccw(c100.651,121.009) pad.0@101.483,120.177
  Bottom Layer w0.8: 99.695,119.832 pad.0@101.6,119.832 ; 100.083,119.832 ccw(c100.083,121.577) pad.0@101.317,120.343 ; 100.083,119.832 ccw(c100.083,121.577) pad.0@101.317,120.343 ; 100.083,119.832 ccw(c100.083,121.577) pad.0@101.317,120.343
L-G-D: R1.2 U1.18 | length 26.5
  Top Layer w0.254: v2(89.306,92.786) 90.78,91.313 90.78,89.713 90.449,89.383 90.449,88.265 90.856,87.859 U1.18@91.75,87.859 ; 89.67,92.423 ccw(c89.306,92.059) 89.306,92.573 cw(c89.306,92.059) 89.67,92.423 ; 89.67,92.423 cw(c90.034,92.786) 89.519,92.786 ccw(c90.034,92.786) 89.67,92.423 ; 90.908,87.859 ccw(c90.908,88.22) U1.18@91.163,87.964 ; 90.908,87.859 ccw(c90.908,88.22) U1.18@91.163,87.964 ; 90.908,87.859 ccw(c90.908,88.22) U1.18@91.163,87.964 ; 90.999,87.859 cw(c90.999,87.626) U1.18@91.163,87.791 ; 90.999,87.859 cw(c90.999,87.626) U1.18@91.163,87.791 ; 90.999,87.859 cw(c90.999,87.626) U1.18@91.163,87.791
  Top Layer w0.8: v2(89.3,102.083) R1.2@89.3,103.069
  Bottom Layer w0.254: v2@89.3,92.786 v2(89.3,102.083) ; v2@89.149,101.932 cw(c88.786,101.568) 89.3,101.568 ; v2@89.149,101.932 cw(c88.786,101.568) 89.3,101.568 ; v2@89.149,101.932 cw(c88.786,101.568) 89.3,101.568 ; v2@89.156,92.937 ccw(c88.808,93.285) 89.3,93.285 ; v2@89.156,92.937 ccw(c88.808,93.285) 89.3,93.285 ; v2@89.156,92.937 ccw(c88.808,93.285) 89.3,93.285 ; v2@89.156,92.937 ccw(c88.808,93.285) 89.3,93.285 ; v2@89.156,92.937 ccw(c88.808,93.285) 89.3,93.285 ; 89.3,93.316 ccw(c89.836,93.316) v2@89.457,92.937 ; 89.3,93.316 ccw(c89.836,93.316) v2@89.457,92.937 ; 89.3,93.316 ccw(c89.836,93.316) v2@89.457,92.937 ; 89.3,93.316 ccw(c89.836,93.316) v2@89.457,92.937 ; 89.3,93.316 ccw(c89.836,93.316) v2@89.457,92.937 ; 89.3,101.568 cw(c89.814,101.568) v2@89.451,101.932 ; 89.3,101.568 cw(c89.814,101.568) v2@89.451,101.932 ; 89.3,101.568 cw(c89.814,101.568) v2@89.451,101.932
L-R: 
L-R-D: R2.2 R17.2 U1.10 | length 164.8
  Top Layer w0.254: v2(84.582,71.73) 84.582,70.764 85.827,69.52 89.23,69.52 89.814,68.936 90.551,68.936 91.338,69.723 94.183,69.723 95.047,68.859 95.047,67.488 97.612,64.922 v2@97.815,64.922 ; v2(93.751,84.858) 94.154,84.858 ; v2(106.274,97.536) 106.274,97.155 ; v1(108.877,67.627) 108.877,67.399 v1@108.89,67.386 ; R17.2@108.89,66.531 v1@108.89,67.386 ; 115.282,118.686 116.619,117.348 118.618,117.348 119.939,116.027 119.939,108.636 117.272,105.969 117.272,103.911 v2@115.697,102.337 ; v2@84.431,71.579 cw(c84.068,71.215) 84.582,71.215 ; v2@84.431,71.579 cw(c84.068,71.215) 84.582,71.215 ; v2@84.431,71.579 cw(c84.068,71.215) 84.582,71.215 ; 84.582,71.215 cw(c85.096,71.215) v2@84.733,71.579 ; 84.582,71.215 cw(c85.096,71.215) v2@84.733,71.579 ; 84.582,71.215 cw(c85.096,71.215) v2@84.733,71.579 ; v2@93.716,84.878 cw(c94.239,84.576) 94.082,85.159 ; v2@93.716,84.878 cw(c94.239,84.576) 94.082,85.159 ; v2@93.716,84.878 cw(c94.239,84.576) 94.082,85.159 ; v2@93.751,84.817 ccw(c93.751,85.69) 94.369,85.072 ; v2@93.751,84.817 ccw(c93.751,85.69) 94.369,85.072 ; v2@93.751,84.817 ccw(c93.751,85.69) 94.369,85.072 ; v2@93.751,85.071 ccw(c93.751,86.557) 94.802,85.506 ; v2@93.751,85.071 ccw(c93.751,86.557) 94.802,85.506 ; v2@93.751,85.071 ccw(c93.751,86.557) 94.802,85.506 ; v2@93.922,84.985 ccw(c94.073,85.098) 94.122,84.916 ; v2@93.922,84.985 ccw(c94.073,85.098) 94.122,84.916 ; v2@93.922,84.985 ccw(c94.073,85.098) 94.122,84.916 ; v2@93.927,84.738 cw(c94.154,84.584) 94.154,84.858 ; v2@93.927,84.738 cw(c94.154,84.584) 94.154,84.858 ; v2@93.927,84.738 cw(c94.154,84.584) 94.154,84.858 ; v2@93.927,84.978 ccw(c94.154,85.132) 94.154,84.858 ; v2@93.927,84.978 ccw(c94.154,85.132) 94.154,84.858 ; v2@93.927,84.978 ccw(c94.154,85.132) 94.154,84.858 ; v2@93.944,84.767 cw(c94.193,84.651) 94.122,84.916 ; v2@93.944,84.767 cw(c94.193,84.651) 94.122,84.916 ; v2@93.944,84.767 cw(c94.193,84.651) 94.122,84.916 ; 94.154,84.858 95.453,86.157 95.453,86.868 96.934,88.349 97.213,88.349 97.8,88.936 U1.10@97.8,89.902 97.8,90.968 98.044,91.211 100.33,91.211 106.274,97.155 ; 97.044,65.491 ccw(c97.841,66.288) v2@97.841,65.161 ; 97.044,65.491 ccw(c97.841,66.288) v2@97.841,65.161 ; 97.044,65.491 ccw(c97.841,66.288) v2@97.841,65.161 ; 97.477,65.057 ccw(c97.841,65.421) v2@97.841,64.907 ; 97.477,65.057 ccw(c97.841,65.421) v2@97.841,64.907 ; 97.477,65.057 ccw(c97.841,65.421) v2@97.841,64.907 ; 97.516,65.248 cw(c97.364,64.679) v2@97.877,64.968 ; 97.516,65.248 cw(c97.364,64.679) v2@97.877,64.968 ; 97.516,65.248 cw(c97.364,64.679) v2@97.877,64.968 ; U1.10@97.713,89.29 cw(c97.503,89.08) 97.8,89.08 ; U1.10@97.713,89.29 cw(c97.503,89.08) 97.8,89.08 ; U1.10@97.713,89.29 cw(c97.503,89.08) 97.8,89.08 ; U1.10@97.713,90.514 ccw(c97.503,90.724) 97.8,90.724 ; U1.10@97.713,90.514 ccw(c97.503,90.724) 97.8,90.724 ; U1.10@97.713,90.514 ccw(c97.503,90.724) 97.8,90.724 ; 97.8,89.08 cw(c98.097,89.08) U1.10@97.887,89.29 ; 97.8,89.08 cw(c98.097,89.08) U1.10@97.887,89.29 ; 97.8,89.08 cw(c98.097,89.08) U1.10@97.887,89.29 ; 97.8,90.724 ccw(c98.097,90.724) U1.10@97.887,90.514 ; 97.8,90.724 ccw(c98.097,90.724) U1.10@97.887,90.514 ; 97.8,90.724 ccw(c98.097,90.724) U1.10@97.887,90.514 ; v2@106.162,97.355 cw(c106.039,97.155) 106.274,97.155 ; v2@106.162,97.355 cw(c106.039,97.155) 106.274,97.155 ; v2@106.162,97.355 cw(c106.039,97.155) 106.274,97.155 ; 106.274,97.155 cw(c106.508,97.155) v2@106.385,97.355 ; 106.274,97.155 cw(c106.508,97.155) v2@106.385,97.355 ; 106.274,97.155 cw(c106.508,97.155) v2@106.385,97.355 ; R17.2@108.653,66.86 ccw(c108.187,67.386) v1@108.89,67.386 ; R17.2@108.653,66.86 ccw(c108.187,67.386) v1@108.89,67.386 ; R17.2@108.653,66.86 ccw(c108.187,67.386) v1@108.89,67.386 ; v1@108.719,67.47 cw(c108.308,67.058) R17.2@108.89,67.058 ; v1@108.719,67.47 cw(c108.308,67.058) R17.2@108.89,67.058 ; v1@108.719,67.47 cw(c108.308,67.058) R17.2@108.89,67.058 ; v1@108.735,67.456 cw(c108.552,67.234) 108.829,67.16 ; v1@108.735,67.456 cw(c108.552,67.234) 108.829,67.16 ; v1@108.735,67.456 cw(c108.552,67.234) 108.829,67.16 ; v1@108.735,67.456 cw(c108.552,67.234) 108.829,67.16 ; v1@108.735,67.456 cw(c108.552,67.234) 108.829,67.16 ; v1@108.735,67.456 cw(c108.552,67.234) 108.829,67.16 ; R17.2@108.749,66.922 ccw(c108.668,67.107) 108.863,67.159 ; R17.2@108.749,66.922 ccw(c108.668,67.107) 108.863,67.159 ; R17.2@108.749,66.922 ccw(c108.668,67.107) 108.863,67.159 ; v1@108.766,67.434 cw(c108.582,67.117) 108.937,67.212 ; v1@108.766,67.434 cw(c108.582,67.117) 108.937,67.212 ; v1@108.766,67.434 cw(c108.582,67.117) 108.937,67.212 ; v1@108.766,67.434 cw(c108.582,67.117) 108.937,67.212 ; v1@108.766,67.434 cw(c108.582,67.117) 108.937,67.212 ; v1@108.766,67.434 cw(c108.582,67.117) 108.937,67.212 ; 108.857,67.262 cw(c109.13,67.189) v1@108.989,67.434 ; 108.857,67.262 cw(c109.13,67.189) v1@108.989,67.434 ; 108.857,67.262 cw(c109.13,67.189) v1@108.989,67.434 ; 108.857,67.262 cw(c109.13,67.189) v1@108.989,67.434 ; 108.857,67.262 cw(c109.13,67.189) v1@108.989,67.434 ; 108.857,67.262 cw(c109.13,67.189) v1@108.989,67.434 ; 108.863,67.159 ccw(c109.229,67.257) R17.2@109.063,66.916 ; 108.863,67.159 ccw(c109.229,67.257) R17.2@109.063,66.916 ; 108.863,67.159 ccw(c109.229,67.257) R17.2@109.063,66.916 ; 108.89,67.12 cw(c109.385,67.12) v1@109.035,67.47 ; 108.89,67.12 cw(c109.385,67.12) v1@109.035,67.47 ; 108.89,67.12 cw(c109.385,67.12) v1@109.035,67.47 ; v1@108.89,67.386 ccw(c109.555,67.386) R17.2@109.135,66.87 ; v1@108.89,67.386 ccw(c109.555,67.386) R17.2@109.135,66.87 ; v1@108.89,67.386 ccw(c109.555,67.386) R17.2@109.135,66.87 ; 108.956,67.138 cw(c109.304,67.231) v1@109.04,67.476 ; 108.956,67.138 cw(c109.304,67.231) v1@109.04,67.476 ; 108.956,67.138 cw(c109.304,67.231) v1@109.04,67.476 ; 108.956,67.138 cw(c109.304,67.231) v1@109.04,67.476 ; 108.956,67.138 cw(c109.304,67.231) v1@109.04,67.476 ; 108.956,67.138 cw(c109.304,67.231) v1@109.04,67.476 ; v2@115.658,102.452 cw(c116.06,102.306) 115.95,102.719 ; v2@115.658,102.452 cw(c116.06,102.306) 115.95,102.719 ; v2@115.658,102.452 cw(c116.06,102.306) 115.95,102.719 ; v2@115.697,102.651 ccw(c115.697,103.411) 116.234,102.874 ; v2@115.697,102.651 ccw(c115.697,103.411) 116.234,102.874 ; v2@115.697,102.651 ccw(c115.697,103.411) 116.234,102.874 ; v2@115.91,102.438 cw(c116.179,102.438) 115.989,102.628 ; v2@115.91,102.438 cw(c116.179,102.438) 115.989,102.628 ; v2@115.91,102.438 cw(c116.179,102.438) 115.989,102.628
  Top Layer w0.6: R2.2@114.236,119.732 115.282,118.686 ; R2.2@114.6,119.732 ccw(c115.48,119.732) 114.858,119.11 ; R2.2@114.6,119.732 ccw(c115.48,119.732) 114.858,119.11 ; R2.2@114.6,119.732 ccw(c115.48,119.732) 114.858,119.11
  Bottom Layer w0.254: v2(84.582,71.73) 84.582,75.165 90.48,81.063 90.48,81.586 v2(93.751,84.858) ; v2(97.841,64.948) 98.497,64.291 106.455,64.291 107.874,65.71 107.874,67.107 108.394,67.627 ; v2(106.274,97.536) 106.36,97.622 106.623,97.358 ; v1(108.877,67.627) 108.394,67.627 ; v2(115.697,102.438) 115.697,101.117 114.503,99.924 110.385,99.924 108.397,97.936 108.397,97.907 107.848,97.358 106.623,97.358 ; v2@84.431,71.88 ccw(c84.068,72.244) 84.582,72.244 ; v2@84.431,71.88 ccw(c84.068,72.244) 84.582,72.244 ; v2@84.431,71.88 ccw(c84.068,72.244) 84.582,72.244 ; 84.582,72.244 ccw(c85.096,72.244) v2@84.733,71.88 ; 84.582,72.244 ccw(c85.096,72.244) v2@84.733,71.88 ; 84.582,72.244 ccw(c85.096,72.244) v2@84.733,71.88 ; 93.388,84.494 ccw(c93.024,84.858) v2@93.538,84.858 ; 93.388,84.494 cw(c93.751,84.13) v2@93.751,84.645 ; 93.388,84.494 ccw(c93.024,84.858) v2@93.538,84.858 ; 93.388,84.494 cw(c93.751,84.13) v2@93.751,84.645 ; 93.388,84.494 ccw(c93.024,84.858) v2@93.538,84.858 ; 93.388,84.494 cw(c93.751,84.13) v2@93.751,84.645 ; v2@97.841,64.735 cw(c97.841,64.221) 98.204,64.584 ; v2@97.841,64.735 cw(c97.841,64.221) 98.204,64.584 ; v2@97.841,64.735 cw(c97.841,64.221) 98.204,64.584 ; v2@98.054,64.948 ccw(c98.568,64.948) 98.204,64.584 ; v2@98.054,64.948 ccw(c98.568,64.948) 98.204,64.584 ; v2@98.054,64.948 ccw(c98.568,64.948) 98.204,64.584 ; v2@106.245,97.507 ccw(c106.604,97.866) 106.604,97.358 ; v2@106.245,97.507 ccw(c106.604,97.866) 106.604,97.358 ; v2@106.245,97.507 ccw(c106.604,97.866) 106.604,97.358 ; v2@106.407,97.37 cw(c106.509,97.243) 106.623,97.358 ; v2@106.407,97.37 cw(c106.509,97.243) 106.623,97.358 ; v2@106.407,97.37 cw(c106.509,97.243) 106.623,97.358 ; v2@106.424,97.687 ccw(c107.217,98.479) 107.217,97.358 ; v2@106.424,97.687 ccw(c107.217,98.479) 107.217,97.358 ; v2@106.424,97.687 ccw(c107.217,98.479) 107.217,97.358 ; v2@106.432,97.394 cw(c106.666,97.183) 106.824,97.456 ; v2@106.432,97.394 cw(c106.666,97.183) 106.824,97.456 ; v2@106.432,97.394 cw(c106.666,97.183) 106.824,97.456 ; 108.395,67.627 ccw(c108.395,68.038) v1@108.707,67.772 ; 108.395,67.627 cw(c108.395,67.217) v1@108.707,67.483 ; 108.395,67.627 ccw(c108.395,68.038) v1@108.707,67.772 ; 108.395,67.627 cw(c108.395,67.217) v1@108.707,67.483 ; 108.395,67.627 ccw(c108.395,68.038) v1@108.707,67.772 ; 108.395,67.627 cw(c108.395,67.217) v1@108.707,67.483 ; v2@115.546,102.288 cw(c115.183,101.924) 115.697,101.924 ; v2@115.546,102.288 cw(c115.183,101.924) 115.697,101.924 ; v2@115.546,102.288 cw(c115.183,101.924) 115.697,101.924 ; 115.697,101.924 cw(c116.211,101.924) v2@115.848,102.288 ; 115.697,101.924 cw(c116.211,101.924) v2@115.848,102.288 ; 115.697,101.924 cw(c116.211,101.924) v2@115.848,102.288
LED-G: 
LED-R: pad.0@106.68,120.36 R2.1 | length 13
  Top Layer w0.254: pad.0@106.68,119.832 106.68,119.609 pad.0@106.883,119.609 ; R2.1@112.536,119.507 R2.1@112.536,119.732
  Top Layer w0.5: 108.763,119.832 112.451,119.832 112.536,119.747 R2.1@112.536,119.507 ; 111.755,119.832 cw(c111.755,118.887) R2.1@112.423,119.555 ; 111.755,119.832 cw(c111.755,118.887) R2.1@112.423,119.555 ; 111.755,119.832 cw(c111.755,118.887) R2.1@112.423,119.555
  Top Layer w0.6: pad.0@106.883,119.609 pad.0@107.106,119.832
  Top Layer w0.8: pad.0@107.106,119.832 108.763,119.832 ; pad.0@106.963,120.343 ccw(c108.197,121.577) 108.197,119.832 ; pad.0@106.963,120.343 ccw(c108.197,121.577) 108.197,119.832 ; pad.0@106.963,120.343 ccw(c108.197,121.577) 108.197,119.832
MISO: SPI1.2 SPI2.2 U1.2 | length 54.5
  Top Layer w0.254: v2(98.095,97.663) 97.104,96.672 97.104,92.761 97.561,92.304 99.416,92.304 104.267,97.155 104.267,97.815 ; 100.768,83.877 v2(101.575,84.684) ; 97.731,97.299 ccw(c97.368,97.663) v2@97.882,97.663 ; 97.731,97.299 cw(c98.095,96.936) v2@98.095,97.45 ; 97.731,97.299 ccw(c97.368,97.663) v2@97.882,97.663 ; 97.731,97.299 cw(c98.095,96.936) v2@98.095,97.45 ; 97.731,97.299 ccw(c97.368,97.663) v2@97.882,97.663 ; 97.731,97.299 cw(c98.095,96.936) v2@98.095,97.45 ; 100.068,92.956 ccw(c99.704,93.32) v2@100.219,93.32 ; 100.068,92.956 cw(c100.432,92.592) v2@100.432,93.107 ; 100.068,92.956 ccw(c99.704,93.32) v2@100.219,93.32 ; 100.068,92.956 cw(c100.432,92.592) v2@100.432,93.107 ; 100.068,92.956 ccw(c99.704,93.32) v2@100.219,93.32 ; 100.068,92.956 cw(c100.432,92.592) v2@100.432,93.107 ; v2@100.432,93.533 ccw(c100.432,94.047) 100.795,93.683 ; v2@100.432,93.533 ccw(c100.432,94.047) 100.795,93.683 ; v2@100.432,93.533 ccw(c100.432,94.047) 100.795,93.683 ; v2@100.645,93.32 cw(c101.159,93.32) 100.795,93.683 ; v2@100.645,93.32 cw(c101.159,93.32) 100.795,93.683 ; v2@100.645,93.32 cw(c101.159,93.32) 100.795,93.683 ; 101.211,84.32 ccw(c100.847,84.684) v2@101.362,84.684 ; 101.211,84.32 cw(c101.575,83.956) v2@101.575,84.471 ; 101.211,84.32 ccw(c100.847,84.684) v2@101.362,84.684 ; 101.211,84.32 cw(c101.575,83.956) v2@101.575,84.471 ; 101.211,84.32 ccw(c100.847,84.684) v2@101.362,84.684 ; 101.211,84.32 cw(c101.575,83.956) v2@101.575,84.471
  Top Layer w0.5: U1.2@99.825,83.877 100.768,83.877
  Top Layer w0.7: 104.267,97.815 SPI1.2@104.267,100.032
  Bottom Layer w0.254: v2(98.095,97.663) 98.095,97.942 98.87,98.718 ; v2(100.432,93.32) 99.085,91.973 99.085,87.133 v2@101.56,84.658 ; v2@98.054,97.663 cw(c98.629,97.663) 98.222,98.07 ; v2@98.054,97.663 cw(c98.629,97.663) 98.222,98.07 ; v2@98.054,97.663 cw(c98.629,97.663) 98.222,98.07 ; v2@98.115,97.627 ccw(c97.814,98.15) 98.396,97.994 ; v2@98.115,97.627 ccw(c97.814,98.15) 98.396,97.994 ; v2@98.115,97.627 ccw(c97.814,98.15) 98.396,97.994 ; v2@98.308,97.663 cw(c99.497,97.663) 98.656,98.504 ; v2@98.308,97.663 cw(c99.497,97.663) 98.656,98.504 ; v2@98.308,97.663 cw(c99.497,97.663) 98.656,98.504 ; 100.068,92.956 ccw(c99.704,93.32) v2@100.219,93.32 ; 100.068,92.956 cw(c100.432,92.592) v2@100.432,93.107 ; 100.068,92.956 ccw(c99.704,93.32) v2@100.219,93.32 ; 100.068,92.956 cw(c100.432,92.592) v2@100.432,93.107 ; 100.068,92.956 ccw(c99.704,93.32) v2@100.219,93.32 ; 100.068,92.956 cw(c100.432,92.592) v2@100.432,93.107 ; 101.142,85.076 ccw(c101.575,85.508) v2@101.575,84.897 ; 101.142,85.076 ccw(c101.575,85.508) v2@101.575,84.897 ; 101.142,85.076 ccw(c101.575,85.508) v2@101.575,84.897 ; 101.239,84.979 cw(c100.944,84.684) v2@101.362,84.684 ; 101.239,84.979 cw(c100.944,84.684) v2@101.362,84.684 ; 101.239,84.979 cw(c100.944,84.684) v2@101.362,84.684
  Bottom Layer w0.6: 98.87,98.718 98.87,101.803